# Altium PCB PoHalf.PcbDoc (part 2 of 2)
Units mil, origin at the board's own origin, x right, y up, seen from the top; angles counter-clockwise.
Board outline 6500 x 4500 mil, 2 copper layers (Top Layer, Bottom Layer), stack 33.512 mil thick; 134 components, 97 nets, 504 pads, 130 vias.
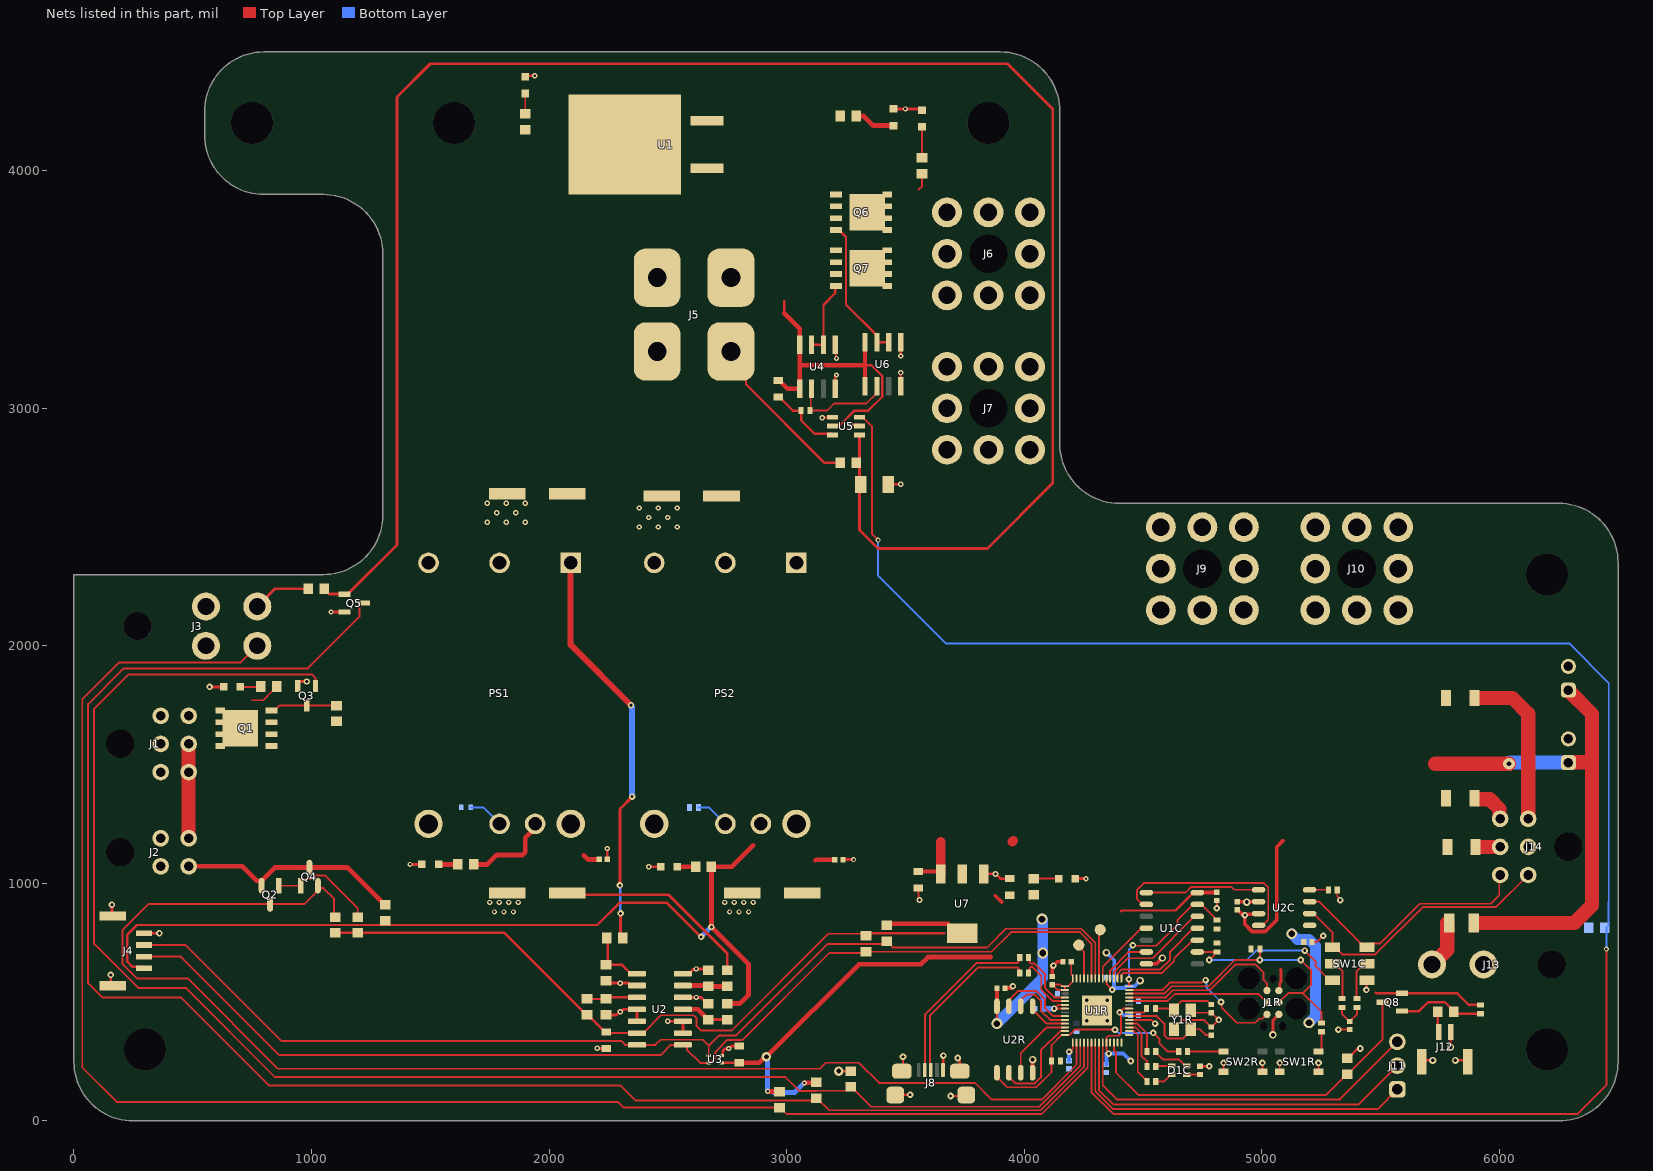
[diagram p2: the nets of this part, all layers, seen from the top]

## Via types
v1: diameter 22, hole 10, Top Layer to Bottom Layer, tented both sides, 56 vias
v2: diameter 27.56, hole 11.81, Top Layer to Bottom Layer, tented both sides, 40 vias
v3: diameter 27, hole 13, Top Layer to Bottom Layer, tented both sides, 11 vias
v4: diameter 31.5, hole 15.75, Top Layer to Bottom Layer, tented both sides, 10 vias
v5: diameter 45.28, hole 27.56, Top Layer to Bottom Layer, tented both sides, 5 vias
v6: diameter 30, hole 15, Top Layer to Bottom Layer, tented both sides, 3 vias
v7: diameter 25, hole 12, Top Layer to Bottom Layer, tented both sides, 2 vias
v8: diameter 40, hole 20, Top Layer to Bottom Layer, tented both sides, 2 vias
v9: diameter 50, hole 20, Top Layer to Bottom Layer, tented both sides, 1 vias

## Nets (pads, with @x,y where several pads share a name; then routed paths per layer and width w, separated by ;. In a path a pad name is that pad's centre, name@x,y a point inside that pad or via, vN(x,y) a via of type N, cw(c..) or ccw(c..) an arc to the next point about the centre after c; other vN are vias at no path point) (continued)
3V3_MEAS: R9.2 R11.1 U2.3 | length 212.7
  Top Layer w10: R9.2@2160,513.5 R11.1@2240,513.5 2246.5,520 U2.3@2370,520
3V3_RP2CAN: C1C.1 C3C.1 C3R.1 C4.1 C4R.1 C5C.1 C5R.1 C6R.1 C7R.1 C8.1 C8R.1 C9R.1 C10R.1 C11.1 D1C.4 J1R.2 Q8.2 R1C.1 R3.1 R4C.1 R4R.1 R5.1 R5R.1 R9.1 R20.1 R22.1 R26.1 R27.1 R28.2 R31.1 U1C.14 U1R.1 U1R.10 U1R.22 U1R.33 U1R.42 U1R.43 U1R.44 U1R.48 U1R.49 U2.6 U2C.5 U2R.8 U3.3 U7.2 U7.4 | length 8643.8
  Top Layer w7.87: U2.6@2370,370 2395.59,370 2470.59,445 2609,445 2620,434 2620,400 2640,380 2768,380 3176,788 R26.1@3342.5,788 ; C4R.1@4117.95,573.8 C4R.1@4118.73,573.8 ; U1R.49@4171.59,472.81 v2(4126.81,472.81) 4142.55,488.56 U1R.48@4171.59,488.56 ; U1R.43@4184.88,567.3 4204.56,586.99 U1R.42@4204.56,600.27 4204.56,613.56 4202.68,613.56 4198.07,618.17 C10R.1@4198.07,669.66 ; v2(4188.81,291.71) 4191.7,291.71 4204.56,304.57 U1R.1@4204.56,329.6 ; U1R.33@4346.29,600.27 4346.29,576.75 v2(4371.1,551.95) ; v2(4356.14,283.84) 4356.14,287.59 4346.29,297.43 4346.29,349.41 4355.52,358.64 4371.77,358.64 4397.47,358.64 4407.96,369.12 4407.96,445.19 4401.41,451.74 v2(4401.41,457.06) 4417.16,472.81 U1R.22@4442.26,472.81 ; C1C.1@4810.37,961.89 C1C.1@4810.86,962.38 ; C4R.1@4118.73,573.8 4125.82,566.71 4125.82,565.92 4140.19,551.55 U1R.44@4171.59,551.55 U1R.43@4171.59,567.3 4158.3,567.3 4151.81,573.8 C4R.1@4118.73,573.8
  Top Layer w9.84: v5(3885.47,409.82) U2R.8@3885.47,482.6 ; 4408.89,883.13 4411.77,886 4637.04,886 4712.93,961.89 U1C.14@4729.66,961.89 ; D1C.4@4684.88,195.25 4685.17,195.55 4737.59,195.55 C5C.1@4739.99,193.14
  Top Layer w10: R3.1@1100,791.5 R5.1@1195,791.5 1812.5,791.5 2157.5,446.5 R9.1@2160,446.5 2175,431.5 2178.5,431.5 2235,375 C4.1@2240,375 2245,370 U2.6@2370,370 ; U3.3@2727.56,244.25 2799.25,244.25 C8.1@2800,245 ; R26.1@3334,779.5 3342.5,788 3344.5,790 3664,790 ; C5C.1@4739.99,193.14 C5C.1@4739.99,195.27 ; 5480,540 5482.5,537.5 Q8.2@5591,537.5 5822.5,537.5 5871.3,488.7 R31.1@5920,488.7
  Top Layer w11.81: J1R.2@5072.08,548.8 5075.75,552.47 5075.75,580.23 5080.49,584.96 5080.49,636.26 5078.58,638.17
  Top Layer w15.75: 3878.58,948.4 3905.35,921.63 ; U2R.8@3885.47,482.6 C3R.1@3885.47,559.43 ; U1C.14@4729.66,961.89 C1C.1@4810.37,961.89
  Top Layer w20: C8.1@2800,245 2800.07,245.07 2884.66,245.07 2909.59,270 v8(2915,270) 3305,660 3565.5,660 3595.5,690 3859.13,690 ; v1(2920,125) 2920.54,125 2922.04,123.5 R20.1@2970,123.5 ; v1(3075,160) 3075.38,160.38 3121.88,160.38 R22.1@3125,163.5 ; R27.1@3416.37,830 U7.4@3680,830
  Bottom Layer w15.75: C7R.1@4188.81,253.72 v2(4188.81,291.71) ; C6R.1@4346.29,237.97 4346.29,283.84 4417.16,283.84 v2(4448.66,252.34) ; v4(4346.29,709.03) 4379.17,676.16 C9R.1@4379.17,602.73 4378.48,602.04 v2@4378.48,559.33 ; v2(4371.1,551.95) v2@4378.48,559.33 ; v2(4401.41,457.06) 4406.74,457.06 4418.65,445.15 C8R.1@4447.28,445.15 ; v4(4488.03,590.92) 4464.01,566.91 4428.55,566.91 4420.97,559.33 v2@4378.48,559.33
  Bottom Layer w20: v8(2915,270) 2915,264.59 2920,259.59 v1(2920,125) 2920.38,124.62 2940.57,124.62 2945.19,120 3035,120 v1(3075,160)
  Bottom Layer w23.62: 4041.08,565.43 4079.96,526.55 C5R.1@4079.96,472.81 v2(4126.81,472.81)
  Bottom Layer w45.28: v5(3885.47,409.82) 4041.08,565.43 4078,602.35 v5(4078,707) 4078,847 v5(4075,850) ; v5(5125.82,787.77) 5149.64,763.95 5199.29,763.95 5226.22,737.02 5226.22,441.02 5198.89,413.69 v5(5198.89,413.13)
5V: C4C.1 C7.1 C9.1 C10.1 F3.1 J4.1 PS2.7 PS2.8 R6.1 R13.1 R17.1 U2C.3 U7.3 | length 4670.9
  Top Layer w10: J4.1@295,642.36 288.9,648.46 246.54,648.46 225,670 225,785 265,825 2203,825 2296,918 2497,918 v3(2640,775)
  Top Layer w15.75: C10.1@3555,1050 U7.3@3639.45,1050 ; C4C.1@4897.48,888.76 4898.26,888.76 4916.74,870.28 4925.2,870.28 v2(4928.97,866.51) ; U2C.3@4987.04,873.01 4984.03,870 4932.45,870 v2(4928.97,866.51) ; 5090,1180 5063,1153 5063,845.49 5014.54,797.02 4959.55,797.02 4928.97,827.6 v2(4928.97,866.51)
  Top Layer w20: R17.1@2750,493.5 2750.72,494.22 2802.5,494.22 2840,531.72 2840,660 v3(2683.5,816.5) R13.1@2683.5,1070 2770,1070 2860,1160 ; 3122,1097 3125,1100 C9.1@3202.87,1100
  Top Layer w40: U7.3@3649.45,1040 3649.45,1174.45 ; 3949.45,1174.45 3955,1180
  Bottom Layer w20: v3(2640,775) 2641,775 2682.5,816.5 v3(2683.5,816.5)
5V_MEAS: R15.1 R17.2 U2.11 | length 206.2
  Top Layer w12: R15.1@2670,426.5 R17.2@2750,426.5
  Top Layer w20: U2.11@2563.31,470 2626.5,470 2657.5,439 2657.5,436.5 2667.5,426.5 R15.1@2670,426.5
12V: C2.1 C3.1 F2.1 F4.2 J1.4 J1.5 J2.4 J15.1 J16.1 PS1.7 PS1.8 Q1.1 Q1.2 Q1.3 R4.1 R7.1 R16.1 | length 3807.2
  Top Layer w12: C2.1@2076,960 2084,952 2503,952 2750,705 R16.1@2750,633.5
  Top Layer w20: J1.5@482.41,1586.18 J1.5@483.11,1586.89 ; R7.1@1683.5,1080 1740,1080 1780,1120 1888.28,1120 1900,1131.72 1900,1191.13 1941.57,1232.71 PS1.7@1941.57,1250.79 ; 2146,1118 2163,1101 C3.1@2210.88,1101
  Top Layer w60: J2.4@482.41,1190 J1.5@482.41,1586.18 ; 5730,1503.44 v9(6040.66,1503.44) ; 5920.16,833.44 6315.66,833.44 6390.66,908.44 6390.66,1513.44 ; J16.1@6290.66,1508.44 6292.55,1510.33 6387.55,1510.33 6390.66,1513.44 ; J15.1@6290.66,1813.44 6390.66,1713.44 6390.66,1513.44
  Bottom Layer w60: v9(6040.66,1503.44) 6045.66,1508.44 J16.1@6290.66,1508.44
"12V Toggle": J1.6 Q1.D R1.2 | length 130
  Top Layer w7.87: 750,1771 796.5,1771 835.94,1810.44 838.44,1810.44 854.5,1826.5 R1.2@854.5,1829
12V_MEAS: R14.1 R16.2 U2.13 | length 188.1
  Top Layer w20: U2.13@2563.31,570 2666.5,570 R14.1@2670,566.5 R16.2@2750,566.5
AUX_SWITCH: J3.3 R20.2 U1R.5 | length 6880.3
  Top Layer w7.87: J3.3@771.94,2000 701.07,1929.13 189.13,1929.13 35,1775 35,225 180,80 2290,80 2313.5,56.5 R20.2@2970,56.5 2972.5,56.5 2999.7,29.3 4073.35,29.3 4267.55,223.51 U1R.5@4267.55,329.6
CANCLK_RP2CAN: U1C.6 U1R.32 | length 217.8
  Top Layer w7.87: U1R.32@4362.04,600.27 4362.04,633.13 4440.31,711.39 U1C.6@4514.6,711.39
CANH: J14.6 SW1C.4 U2C.7 | length 1086.1
  Top Layer w7.87: U2C.7@5184.88,923.01 U2C.7@5201.61,923.01 5241.96,923.01 5415.19,749.78 5415.19,746.43 5430.94,730.69 SW1C.4@5442.75,730.69 ; SW1C.4@5454.56,730.69 SW1C.4@5442.75,730.69 ; J14.6@6003.25,1035.33 6000,1032.07 6000,950 5964.24,914.24 5664.24,914.24 5496.43,746.43 5458.5,746.43 SW1C.4@5442.75,730.69
CANL: J14.3 SW1C.1 U2C.6 | length 1183.7
  Top Layer w8: U2C.6@5184.88,873.01 U2C.6@5201.61,873.01 5218.34,873.01 5297.08,794.27 SW1C.1@5297.08,730.69 5308.89,730.69 5338.88,700.7 5478.51,700.7 5677.81,900 5986.04,900 J14.3@6121.36,1035.33
CANRX_RP2CAN: U1C.2 U2C.4 | length 845.4
  Top Layer w7.87: U1C.2@4514.6,911.39 4497.87,911.39 4474.25,935.02 4474.25,971.18 4504.03,1000.96 5009.23,1000.96 5027.4,982.79 5027.4,847.01 5003.4,823.01 U2C.4@4987.04,823.01
CANTX_RP2CAN: U1C.1 U2C.1 | length 487.4
  Top Layer w7.87: U1C.1@4514.6,961.39 4679.03,961.39 4702.85,985.21 4872.49,985.21 4884.7,973.01 U2C.1@4987.04,973.01
DBG_TX_RP2040: J1R.5 U1R.27 | length 714.8
  Top Layer w7.87: U1R.27@4442.26,551.55 4583.25,551.55 4614.75,583.05 4749.16,583.05 4759,592.89 v2(4763.62,592.89) ; v2(4828.58,500.74) 4831.72,497.59 4831.72,475.57 4893.94,413.36 4972.12,413.36 4988.99,430.23 5002.02,430.23 5020.58,448.8 J1R.5@5022.08,448.8
  Bottom Layer w7.87: v2(4763.62,592.89) 4767.35,589.16 4767.35,561.97 v2(4828.58,500.74)
GND: C1.2 C1C.2 C1R.2 C2.2 C2C.1 C2R.2 C3.2 C3C.2 C3R.2 C4.2 C4C.2 C4R.2 C5.2 C5C.2 C5R.2 C6.2 C6R.2 C7.2 C7R.2 C8.2 C8R.2 C9.2 C9R.2 C10.2 C10R.2 C11.2 C11R.2 C12R.2 C13R.2 D1.2 D2.2 D3.2 D4.2 D5.2 D6.2 D7.2 J1.1 J1.2 J1.3 J1R.6 J2.1 J2.2 J3.1 J3.2 J4.4 J4.S1 J4.S2 J5.3 J5.4 J8.5 J8.6 J8.7 J8.8 J8.9 J9.1 J10.1 J12.2 J12.S1 J12.S2 J13.1 J14.2 J15.2 J16.2 PS1.2 PS1.3 PS1.4 PS2.2 PS2.3 PS2.4 Q3.2 Q5.2 R6C.2 R10.2 R11.2 R14.2 R15.2 R24.2 R29.2 R32.1 R33.2 R34.1 SW1C.6 SW1R.B1 SW1R.B2 SW2R.B1 SW2R.B2 U1C.7 U1R.19 U1R.57 U2.2 U2.4 U2.5 U2.9 U2.10 U2.12 U2.14 U2C.2 U2R.4 U3.4 U4.4 U4.5 U5.2 U5.4 U6.4 U6.5 U7.1 Y1R.2 Y1R.4 | length 4049.9
  Top Layer w7.87: v4(4350.23,421.63) U1R.57@4354.17,425.57 ; U1R.19@4442.26,425.57 4535.27,425.57 v2(4551.02,409.82) ; SW2R.B1@4839.4,207.06 v2(4839.4,244.47) ; SW2R.B2@5002.79,207.06 v2(5002.79,244.47) ; SW1R.B1@5075.51,210.8 5075.62,210.92 v2(5075.62,244.47) ; C3C.2@5211.02,753.13 5211.48,753.59 5233.37,753.59 v2(5259.06,779.28) ; SW1R.B2@5239.01,207.06 v2(5239.01,244.47) ; R6C.2@5317.75,973.01 5317.75,946.43 5330.55,933.64 v2(5330.55,929.5) ; v2(5322.67,384.82) C2C.1@5369.92,384.82 ; v2(5440.78,551.55) 5440.78,590.92 SW1C.6@5442.75,592.89
  Top Layer w8: Y1R.4@4630.62,386.2 4630.62,392.1 4664.15,425.63 4756.27,425.63 4786.45,395.45 C1R.2@4787.24,395.45 4788.03,395.45 v2@4818.14,425.57 ; Y1R.2@4700.62,466.2 4711.14,455.69 C2R.2@4787.24,455.69 4788.03,455.69 v2@4818.14,425.57 ; v2(4810.86,895.25) C1C.2@4810.86,928.13 C1C.2@4810.86,930.25 ; v2(4818.73,425.57) v2@4818.14,425.57 ; SW1R.B1@5075.51,210.8 SW1R.B1@5078.18,208.13
  Top Layer w9.84: D3.2@1900,4395 1905,4400 v1(1940,4400) ; v1(3150,2960) 3151.2,2961.2 3191.8,2961.2 U5.4@3193,2962.4 ; U4.4@3205,3082 3205,3135 v1(3210,3140) ; U4.5@3205,3268 3207.67,3265.33 3207.67,3212.33 v1(3210,3210) ; v1(3270,2930) 3302,2930 U5.2@3307,2925 ; U6.4@3480,3092 v1(3480,3150) ; v1(3480,3220) U6.5@3480,3278 ; C5C.2@4739.99,230.1 v2(4779.36,230.1)
  Top Layer w10: v8(3220,210) R24.2@3270,210 ; J8.9@3457.43,108.93 3458.5,110 v2(3520,110) ; J8.6@3484.99,209.33 3490,214.33 v2(3490,270) ; C10.2@3555,980 3555,939.06 3560,934.06 v7(3560,930) ; J8.5@3658.22,214.25 3659.11,215.14 3659.11,274.11 v2(3660,275) ; v2(3690,105) 3752.71,105 J8.8@3756.64,108.93 ; v2(3720,265) 3720,260.25 3729.09,251.16 J8.7@3729.09,209.33 ; U7.1@3830.55,1040 v7(3880,1040) 3900,1020 C11.2@3940,1020 ; R29.2@5360,263.5 5362.5,263.5 5400.64,301.64 5411.64,301.64 v2(5415,305) ; J12.S1@5667.95,229.02 J12.S1@5672.94,234 ; J12.S1@5672.95,249.02 5678.94,255 v6(5720,255) ; v6(5795,310) J12.2@5795,375 ; v6(5815,255) 5861.85,255 J12.S2@5867.83,249.02
  Top Layer w11.81: v4(5047.17,362.25) 5047.17,423.88 J1R.6@5072.08,448.8
  Top Layer w12: v3(155,615) 155,577.64 J4.S2@163.11,569.53 ; v3(160,910) 160,865.94 J4.S1@163.11,862.83 ; J4.4@295,790 v3(360,790) ; v3(571,1827) D1.2@630,1827 ; Q3.2@942.5,1831 942.5,1845 947.5,1850 v3(980,1850) ; v1@1080,2140 v1(1082.5,2142.5) Q5.2@1139,2142.5 ; v1(1415,1080) D2.2@1465,1080 ; v1(2203,306) 2203.5,305.5 2239.5,305.5 C4.2@2240,305 ; R11.2@2240,446.5 2283.79,446.5 2297.29,460 v1(2300,460) 2302.71,460 2312.71,470 U2.4@2370,470 U2.5@2370,420 ; R10.2@2240,590 2250,580 v1(2300,580) 2334.41,580 2344.41,570 U2.2@2370,570 ; v1@2245,1147 v1(2245.14,1146.86) C3.2@2245.14,1101 ; v1(2420,1070) D4.2@2470,1070 ; v1(2500,420) U2.10@2563.31,420 U2.9@2563.31,370 ; U2.12@2563.31,520 v1(2620,520) 2641,520 2667.5,493.5 R15.2@2670,493.5 ; U2.14@2563.31,620 2588.9,620 2606.98,638.09 2618.09,638.09 v1(2620,640) 2663.5,640 R14.2@2670,633.5 ; U3.4@2731.4,275.84 2731.4,295 2739.49,303.09 2754.09,303.09 v1(2756,305) 2757.65,305 2767.65,315 C8.2@2800,315 ; C9.2@3237.13,1100 v1(3282,1100) ; C5.2@3427.48,2680 v1(3480,2680) ; D5.2@3450,4260 v1(3500,4260) D6.2@3560,4260 ; D7.2@4215,1020 v1(4260,1020)
  Top Layer w15.75: C3R.2@3919.72,559.43 3944.72,559.43 v2(3952.59,567.3) ; U2R.4@4035.47,203.07 v4(4035.47,258.34) ; C4R.2@4117.95,608.05 4117.95,645.8 4122.87,650.72 v2(4122.87,653.91) 4138.84,669.89 4163.59,669.89 C10R.2@4163.81,669.66 ; U1C.7@4514.6,661.39 4557.44,661.39 v4(4581.99,685.94) ; C4C.2@4897.48,923.01 4898.16,922.32 4936.16,922.32 v4(4936.85,921.63) 4937.53,922.32 4986.35,922.32 U2C.2@4987.04,923.01
  other v1: 1770,880 1810,880 1850,880 2760,880 2800,880 2840,880 1750,920 1790,920 1830,920 1870,920 2740,920 2780,920 2820,920 2860,920 2380,2500 2460,2500 2540,2500 1740,2520 1820,2520 1900,2520 2420,2540 2500,2540 1780,2560 1860,2560 2380,2580 2460,2580 2540,2580 1740,2600 1820,2600 1900,2600
  other v4: 4263.62,421.63 4263.62,508.24 4350.23,508.24
INT_RP2CAN: U1C.4 U1R.34 | length 297.2
  Top Layer w7.87: U1R.34@4330.55,602.73 4330.55,648.33 4493.61,811.39 U1C.4@4514.6,811.39
KILL_FEEDBACK: Q5.3 R22.2 U1R.4 | length 7142.1
  Top Layer w7.87: Q5.3@1221,2180 1207,2180 1202,2175 1202,2122 985,1905 210,1905 60,1755 60,580 120,520 450,520 820,150 2300,150 2363.26,86.74 3115.24,86.74 R22.2@3125,96.5 3127.5,96.5 3179,45 4069,45 4251.81,227.81 U1R.4@4251.81,329.6
KILL_SWITCH: J3.4 R2.2 | length 245.5
  Top Layer w12: J3.4@771.94,2165.35 846.58,2240 R2.2@986.5,2240
Leak_Detect: Q8.3 R29.1 U1R.12 | length 1544.5
  Top Layer w7.87: U1R.12@4377.79,329.6 4377.79,298.37 4386,290.16 4386,204 4480,110 5271,110 5357.5,196.5 R29.1@5360,196.5 5362.5,196.5 5509,343 Q8.3@5509,500
LEDB_RP2CAN: R8C.1 U1R.18 | length 168.1
  Top Layer w7.87: U1R.18@4442.26,409.82 4475.11,409.82 4516.57,368.36 R8C.1@4516.57,291.71
LEDG_RP2CAN: R7C.1 U1R.17 | length 213.3
  Top Layer w7.87: U1R.17@4442.26,394.07 4468.59,394.07 4493.93,368.73 4493.93,272.05 4503.79,262.2 4506.71,262.2 4516.57,252.34 R7C.1@4516.57,228.72
LEDR_RP2CAN: R5C.1 U1R.16 | length 255
  Top Layer w7.87: U1R.16@4442.26,378.32 4462.07,378.32 4478.18,362.21 4478.18,208.05 4516.57,169.66 R5C.1@4516.57,165.73
MISO_RP2CAN: U1C.12 U1R.31 | length 475
  Top Layer w7.87: U1R.31@4377.79,600.27 4377.79,626.61 4436.2,685.02 4540.32,685.02 4716.7,861.39 U1C.12@4729.17,861.39
MOSI_RP2CAN: U1C.11 U1R.30 | length 454.6
  Top Layer w7.87: U1R.30@4393.54,600.27 4393.54,620.08 4411.23,637.77 4572.79,637.77 4614.01,678.99 4614.01,712.97 4712.44,811.39 U1C.11@4729.17,811.39
MOTOR_EN: R19.1 R21.2 U5.6 | length 319.2
  Top Layer w10: R19.1@2964,3047 2969,3047 3026,2990 R21.2@3061.3,2990 3061.3,2948.7 3117.4,2892.6 3188,2892.6 U5.6@3193,2887.6
MOTOR_PWR: J6.1 J7.1 Q6.D Q7.D R25.1 | length 72.7
  Top Layer w7.87: 3555,3920 3570,3935 R25.1@3570,3986.5
nCS_RP2CAN: R4C.2 U1C.13 U1R.28 | length 646.2
  Top Layer w7.87: v2(4440.78,596.43) 4440.78,567.3 U1R.28@4442.26,567.3 ; v2(4457.73,739.33) 4459.29,737.77 4556.14,737.77 4645.25,826.88 4645.25,844.21 4712.44,911.39 U1C.13@4729.17,911.39 4745.9,911.39 4800.03,857.26 4800.03,852.73 4806.92,845.84 R4C.2@4810.86,845.84
  Bottom Layer w7.87: v2(4440.78,596.43) 4440.78,720.09 4457.73,737.03 v2(4457.73,739.33)
NetC2C_2: C2C.2 R2C.2 R3C.2 | length 144.3
  Top Layer w7.87: R2C.2@5338.42,477.73 5338.42,449.78 5369.13,419.07 C2C.2@5369.92,419.07 5370.7,419.07 5401.41,449.78 R3C.2@5401.41,477.73
NetC2R_1: C2R.1 R1R.2 Y1R.3 | length 263.4
  Top Layer w8: R1R.2@4552.91,472.81 4624.01,472.81 Y1R.3@4630.62,466.2 4630.62,472.1 4664.15,505.63 4770.76,505.63 4786.45,489.94 C2R.1@4787.24,489.94
NetC5_1: C5.1 Q5.1 R2.1 R18.2 U5.1 | length 8119.1
  Top Layer w12: R2.1@1053.5,2240 1053.5,2237.5 1073.5,2217.5 Q5.1@1139,2217.5 1153,2217.5 1360,2424.5 1360,4310 1500,4450 3930,4450 4120,4260 4120,2685 3845,2410 3384.82,2410 3307,2487.82 3307,2680 3307,2770 3307,2813 U5.1@3307,2887.6
NetD1_1: D1.1 R1.1 | length 88.3
  Top Layer w7.87: D1.1@700,1827 785.5,1827 R1.1@787.5,1829
NetD1C_1: D1C.1 R5C.2 | length 80.1
  Top Layer w7.87: R5C.2@4553.97,165.73 4587.44,165.73 4616.96,195.25 D1C.1@4621.88,195.25
NetD1C_2: D1C.2 R7C.2 | length 68.7
  Top Layer w7.87: R7C.2@4553.97,228.72 4555.94,230.69 D1C.2@4621.88,230.69
NetD1C_3: D1C.3 R8C.2 | length 158.5
  Top Layer w7.87: R8C.2@4553.97,291.71 4553.97,287.77 4582.51,259.23 4651.41,259.23 4679.96,230.69 D1C.3@4684.88,230.69
NetD2_1: D2.1 R7.2 | length 81.5
  Top Layer w20: D2.1@1535,1080 R7.2@1616.5,1080
NetD3_1: D3.1 R8.2 | length 85
  Top Layer w7.87: R8.2@1900,4240 D3.1@1900,4325
NetD4_1: D4.1 R13.2 | length 76.5
  Top Layer w20: D4.1@2540,1070 R13.2@2616.5,1070
NetD5_1: D5.1 R23.2 | length 173.1
  Top Layer w20: R23.2@3293.5,4230 3325,4230 3365,4190 D5.1@3450,4190
NetD6_1: D6.1 R25.2 | length 131.5
  Top Layer w7.87: R25.2@3570,4053.5 D6.1@3570,4185
NetD7_1: D7.1 R28.1 | length 105
  Top Layer w7.87: R28.1@4040,1020 D7.1@4145,1020
NetF1_2: F1.2 J14.1 | length 686.8
  Top Layer w60: F1.2@5904.16,1780 6055,1780 6121.36,1713.64 J14.1@6121.36,1271.55
NetF2_2: F2.2 J14.4 | length 145.7
  Top Layer w60: F2.2@5915.16,1354.44 5960.05,1354.44 6001.34,1313.14 6001.34,1273.46 J14.4@6003.25,1271.55
NetF3_2: F3.2 J14.5 | length 92.6
  Top Layer w60: F3.2@5910.66,1153.44 J14.5@6003.25,1153.44
NetF4_1: F4.1 J13.2 | length 203.1
  Top Layer w60: J13.2@5716.72,658.44 5719.17,658.44 5781.16,720.43 F4.1@5781.16,833.44
NetJ11_1: J11.1 U1R.7 | length 1541.5
  Top Layer w7.87: U1R.7@4299.05,329.6 4299.05,125.91 4374.96,50 5488,50 J11.1@5571,133
NetJ11_2: J11.2 U1R.8 | length 1548.1
  Top Layer w7.87: U1R.8@4314.8,329.6 4314.8,142.2 4314.8,130.2 4375,70 5408,70 J11.2@5571,233
NetJ11_3: J11.3 U1R.9 | length 1545.1
  Top Layer w7.87: U1R.9@4330.55,329.6 4330.55,149.45 4389,91 5329,91 J11.3@5571,333
NetJ12_1: J12.1 R30.2 | length 90.3
  Top Layer w10: J12.1@5740.79,355 5740.79,444.29 R30.2@5741.5,445
NetPS1_6: PS1.6 R34.2 | length 150.6
  Bottom Layer w7.87: R34.2@1670,1320 1722.76,1320 PS1.6@1791.97,1250.79
NetPS2_6: PS2.6 R33.1 | length 141.9
  Bottom Layer w7.87: R33.1@2628.7,1320 2672.76,1320 PS2.6@2741.97,1250.79
NetQ1_4: Q1.4 Q3.3 R4.2 | length 281.9
  Top Layer w7.87: Q1.4@832,1728 845,1728 866,1749 Q3.3@980,1749 980.5,1748.5 R4.2@1105,1748.5
NetQ2_1: Q2.1 Q4.1 R5.2 | length 456.2
  Top Layer w7.87: Q2.1@862.05,990 Q4.1@955,990 955,1010.31 963.4,1018.71 998.71,1018.71 1012.89,1032.89 1057.11,1032.89 1195,895 R5.2@1195,858.5
NetQ6_4: Q6.4 U6.6 U6.7 | length 600.9
  Top Layer w9.84: Q6.4@3208,3750 3221,3750 3250,3721 3250,3436 3380,3306 U6.7@3380,3278 U6.6@3430,3278
NetQ7_4: Q7.4 U4.6 U4.7 | length 317.7
  Top Layer w9.84: U4.7@3105,3268 U4.6@3155,3268 3155,3435 3205,3485 Q7.4@3205,3515
NetQ8_1: Q8.1 R30.1 R31.2 | length 366.2
  Top Layer w10: Q8.1@5591,462.5 5662.5,462.5 5700,500 5771,500 5808.5,462.5 R30.1@5808.5,460 5817.2,451.3 R31.2@5920,451.3
NetR2C_1: R2C.1 SW1C.2 | length 172.3
  Top Layer w7.87: SW1C.2@5297.08,661.79 5308.89,661.79 5340.39,630.29 5340.39,517.1 R2C.1@5338.42,515.13
NetR3C_1: R3C.1 SW1C.5 | length 172.3
  Top Layer w7.87: R3C.1@5401.41,515.13 5399.44,517.1 5399.44,630.29 5430.94,661.79 SW1C.5@5442.75,661.79
NetR6C_1: R6C.1 U2C.8 | length 78.7
  Top Layer w7.87: U2C.8@5201.61,973.01 R6C.1@5280.35,973.01
NetR6R_1: R6R.1 SW1R.A2 | length 91.3
  Top Layer w7.87: SW1R.A2@5239.01,291.71 5242.95,291.71 5251.81,300.57 R6R.1@5251.81,375.37
NetR7R_1: R7R.1 SW2R.A1 | length 151.6
  Top Layer w7.87: R7R.1@4687.83,291.71 SW2R.A1@4839.4,291.71
NetR21_1: R21.1 U4.2 U6.2 | length 434.6
  Top Layer w7.87: U4.2@3105,3082 3101.85,3078.85 3101.85,2993.15 R21.1@3098.7,2990 3101.85,2990 3170,2990 3200,3020 3336,3020 3380,3064 U6.2@3380,3092
NetTP1_TP: TP1.TP U1R.39 | length 148.8
  Top Layer w7.87: TP1.TP@4230,740 4230,733.5 4251.81,711.7 U1R.39@4251.81,600.27
NetTP2_TP: TP2.TP U1R.35 | length 206.9
  Top Layer w7.87: U1R.35@4314.8,600.27 4314.8,799.8 TP2.TP@4320,805
NetU1R_11: U1R.11
NetU1R_13: U1R.13
NetU1R_14: U1R.14
NetU1R_15: U1R.15
NetU1R_38: U1R.38
NetU1R_40: U1R.40
NetU1R_41: U1R.41
QSPI_SCLK_RP2040: U1R.52 U2R.6 | length 286.6
  Top Layer w7.87: U2R.6@3985.47,486.59 3985.47,508.25 4009.09,531.87 4045.25,531.87 4070.7,506.42 4070.7,463.76 4108.89,425.57 U1R.52@4171.59,425.57
QSPI_SD0_RP2040: U1R.53 U2R.5 | length 178.4
  Top Layer w7.87: U2R.5@4035.47,486.59 4035.47,468.68 4094.33,409.82 U1R.53@4171.59,409.82
QSPI_SD1_RP2040: U1R.55 U2R.2 | length 427.3
  Top Layer w7.87: U2R.2@3935.47,207.06 3935.47,185.41 3963.03,157.85 3975.63,157.85 3975.68,157.79 4045.25,157.79 4070.7,183.25 4070.7,297.25 4151.78,378.32 U1R.55@4171.59,378.32
QSPI_SD2_RP2040: U1R.54 U2R.3 | length 309.4
  Top Layer w7.87: U2R.3@3985.47,207.06 3985.47,285.21 4094.33,394.07 U1R.54@4171.59,394.07
QSPI_SD3_RP2040: U1R.51 U2R.7 | length 339.2
  Top Layer w7.87: U2R.7@3935.47,486.59 3935.47,508.25 3974.84,547.62 4051.77,547.62 4086.94,512.45 4086.94,476.48 4122.11,441.32 U1R.51@4171.59,441.32
QSPI_SS_RP2040: R5R.2 R7R.2 U1R.56 U2R.1 | length 1007.5
  Top Layer w7.87: U2R.1@3885.47,207.06 3885.47,185.41 3928.83,142.05 4051.77,142.05 4114.99,205.27 R5R.2@4114.99,252.34 4114.99,319.27 U1R.56@4158.3,362.58 ; U1R.56@4171.59,362.58 4191.4,362.58 4213.05,384.23 v2(4382.37,384.23) ; v2(4543.14,370.45) 4570.27,343.32 4570.27,324.91 4603.47,291.71 R7R.2@4650.43,291.71
  Bottom Layer w7.87: v2(4382.37,384.23) 4383.04,384.23 4396.82,370.45 v2(4543.14,370.45)
RUN_RP2040: J1R.4 R4R.2 R6R.2 U1R.26 | length 1275.3
  Top Layer w7.87: U1R.26@4442.26,535.8 4589.77,535.8 4621.27,567.3 4776.19,567.3 4886.42,677.54 v2(4991.96,677.54) R4R.2@4991.96,724.78 ; J1R.4@5072.08,498.8 5111.64,538.36 5172.12,538.36 ; v2(5163.87,677.54) 5165.19,677.54 5207.52,635.21 5207.52,573.76 5172.12,538.36 ; R6R.2@5251.81,412.77 5251.81,458.67 5172.12,538.36
  Bottom Layer w7.87: v2(4991.96,677.54) v2(5163.87,677.54)
SCK_RP2CAN: U1C.10 U1R.29 | length 400.1
  Top Layer w7.87: U1R.29@4409.29,600.27 4409.29,613.56 4417.75,622.02 4579.32,622.02 4631.55,674.26 4631.55,684.02 4708.92,761.39 U1C.10@4729.17,761.39
SCL_0: J4.2 R26.2 U1R.37 U2.8 U3.2 | length 4622.4
  Top Layer w7.87: J4.2@295,691.57 450.43,691.57 865,277 2469.36,277 2512.36,320 2572.13,320 2580,312.13 2580,300 2635.75,244.25 U3.2@2672.44,244.25 2676.38,244.25 2701,268.87 2701,292 2749,340 2775.52,340 2775.76,340.24 2813.24,340.24 3180.5,707.5 R26.2@3334,707.5 ; R26.2@3334,712.5 3862.5,712.5 3945,795 4235,795 4283.3,746.7 U1R.37@4283.3,600.27
SDA_0: J4.3 R27.2 U1R.36 U2.7 U3.1 | length 4647.8
  Top Layer w7.87: J4.3@295,740.79 469.21,740.79 873,337 2303,337 2320,320 U2.7@2370,320 2448,320 2470.05,342.05 2646.83,342.05 2672.44,316.44 ; U3.1@2672.44,275.75 2672.44,316.44 ; R27.2@3421,756.5 R27.2@3432.5,745 ; U1R.36@4299.05,600.27 4299.05,750.99 4240.87,809.17 3922.66,809.17 3843.49,730 3447.5,730 3439.56,737.94 3439.56,740.44 3435,745 R27.2@3432.5,745 ; 2672.44,316.44 2716,360 2788,360 3173,745 R27.2@3432.5,745
Servo: Q2.3 Q4.2 R3.2 U1R.2 | length 5650.1
  Top Layer w7.87: Q4.2@1027.05,990 Q4.2@1027.05,987.76 ; R3.2@1100,858.5 1095,863.5 1095,935 1050,980 1034.81,980 Q4.2@1027.05,987.76 ; U1R.2@4220.31,329.6 4220.31,236.4 4073.91,90 3863,90 3793,160 3389,160 3304,245 3165,245 3139.76,219.76 2585.77,219.76 2585.54,220 859,220 479,600 265,600 205,660 205,805 313.09,913.09 Q2.3@826.02,913.09 970.45,913.09 1027.05,969.69 Q4.2@1027.05,987.76
SERVO_5V: J2.3 Q2.2 Q4.3 R6.2 | length 967.1
  Top Layer w20: J2.3@483.11,1071.89 708.11,1071.89 768.79,1011.21 787.84,1011.21 Q2.2@790,1009.05 ; Q2.2@787.84,985.47 790,987.63 Q2.2@790,990 Q2.2@790,1009.05 ; R6.2@1310,910 1307.5,910 1150.59,1066.91 Q4.3@991.02,1066.91 846.59,1066.91 790,1010.31 Q2.2@790,1009.05
SOFTWARE_KILL: R32.2 U1R.6 U5.3 | length 8130.7
  Top Layer w7.87: U5.3@3307,2962.4 3320.5,2962.4 3360,2922.9 3360,2470 v1(3385,2445) ; U1R.6@4283.3,329.6 4283.3,126.7 4283.3,121.61 4374.91,30 6330,30 6450.66,150.66 v1(6450.66,723.44)
  Bottom Layer w7.87: v1(3385,2445) 3385,2295 3670,2010 6294.09,2010 6460.89,1843.2 6460.89,921.77 6460.22,921.1 6460.22,823 6450.66,813.44 v1(6450.66,723.44)
Solinoid_3_SW: Q3.1 R24.1 U1R.3 | length 6638.6
  Top Layer w7.87: Q3.1@1017.5,1831 1017.12,1831.38 1017.12,1863.2 1000.32,1880 230,1880 85,1735 85,745 270,560 470,560 845,185 2995,185 3053.26,126.74 3125,126.74 3125.2,126.94 3253.94,126.94 R24.1@3270,143 3272.5,143 3355.5,60 4063.96,60 4236.06,232.1 U1R.3@4236.06,329.6
SWCLK_RP2040: J1R.3 U1R.24 | length 606.9
  Top Layer w7.87: U1R.24@4442.26,504.31 4602.82,504.31 4632.74,534.23 4986.64,534.23 J1R.3@5022.08,498.8
SWDIO_RP2040: J1R.1 U1R.25 | length 718.6
  Top Layer w7.87: U1R.25@4442.26,520.06 4596.3,520.06 4626.22,549.98 4781.61,549.98 4890.87,659.23 4972.12,659.23 5007.52,623.83 5007.52,593.9 5022.08,579.34 J1R.1@5022.08,548.8
TERM_DET_RP2CAN: R1C.2 SW1C.3 U1C.9 | length 723.9
  Top Layer w7.87: U1C.9@4729.17,711.39 R1C.2@4806.92,711.39 ; v2(4779.36,677.54) 4800.03,698.21 4800.03,704.5 R1C.2@4806.92,711.39 ; R1C.2@4810.86,711.39 R1C.2@4806.92,711.39 ; v2(5180.94,716.91) 5227.01,670.84 5227.01,651.15 5285.27,592.89 SW1C.3@5297.08,592.89
  Bottom Layer w7.87: v2(4779.36,677.54) 4936.85,677.54 4976.22,716.91 v2(5180.94,716.91)
USB_N: J8.2 R3R.1 | length 740.9
  Top Layer w7.87: J8.2@3581.45,214.25 3582.13,214.93 3582.13,447.4 3799.08,664.36 3808.74,664.36 3971.74,664.36 3976.35,668.97 3976.35,683.64 R3R.1@3981.14,688.43
USB_P: J8.3 R2R.1 | length 711.3
  Top Layer w7.87: J8.3@3607.04,214.25 3603.1,218.18 3603.1,443.1 3806.49,646.49 3971.74,646.49 3976.35,641.87 3976.35,627.2 R2R.1@3981.14,622.42
USB_RP2040_N: R3R.2 U1R.46 | length 267.4
  Top Layer w7.87: R3R.2@4018.54,688.43 4022.26,684.71 4022.26,667.91 4026.87,663.3 4042.22,663.3 4087.86,617.66 4087.86,558.38 4126.19,520.06 U1R.46@4171.59,520.06
USB_RP2040_P: R2R.2 U1R.47 | length 267.4
  Top Layer w7.87: R2R.2@4018.54,622.42 4022.26,626.14 4022.26,642.94 4026.87,647.55 4035.7,647.55 4072.11,611.14 4072.11,551.86 4119.66,504.31 U1R.47@4171.59,504.31
V+: J5.1 J5.2 Q6.1 Q6.2 Q6.3 Q7.1 Q7.2 Q7.3 R18.1 R19.2 R23.1 U1.1 U1.3 U4.1 U4.8 U5.5 U6.1 U6.8 | length 2098.8
  Top Layer w10: J5.2@2766.02,3238.98 2829.06,3175.94 2829.06,3100.94 3160,2770 R18.1@3226.5,2770 ; 2990,3400 2990,3450 ; U5.5@3193,2925 3196.8,2928.8 3223.92,2928.8 3285.12,2990 3343.98,2990 3402.3,3048.32 3402.3,3135.68 3357.12,3180.86 3330,3180.86
  Top Layer w18: R19.2@2964,3117 2969,3117 3004,3082 U4.1@3055,3082 3055,3180.86 ; 2990,3400 3055,3335 U4.8@3055,3268 3055,3180.86 ; U6.1@3330,3092 3330,3180.86 ; U6.8@3330,3278 3330,3180.86 ; 3055,3180.86 3330,3180.86
Vreg: C1.1 C6.1 F1.1 PS1.1 PS2.1 R8.1 R12.1 U1.2 | length 1709.2
  Top Layer w12: v3(2298,991.37) 2298,1313 v3(2350,1365) ; R12.1@2301,770 v3(2301,874)
  Top Layer w25: PS1.1@2091.18,2349.21 2091.18,2003.82 v3(2345,1750)
  Bottom Layer w12: v3(2298,991.37) 2299.5,989.87 2299.5,875.5 v3(2301,874)
  Bottom Layer w25: v3(2345,1750) 2345,1749.46 2350,1744.46 v3(2350,1365)
Vreg_MEAS: R10.1 R12.2 U2.1 | length 262.7
  Top Layer w10: R12.2@2242.5,770 2246.5,766 2246.5,663.5 R10.1@2240,657 2307.41,657 2344.41,620 U2.1@2370,620
XIN_RP2040: C1R.1 U1R.20 Y1R.1 | length 443.1
  Top Layer w7.87: U1R.20@4442.26,441.32 4558.89,441.32 4590.39,409.82 4590.39,360.52 4604.08,346.83 4667.16,346.83 4700.62,380.29 Y1R.1@4700.62,386.2 4739.9,386.2 4763.62,362.48 4785.96,362.48 C1R.1@4787.24,361.2
XOUT_RP2040: R1R.1 U1R.21 | length 82.1
  Top Layer w7.87: U1R.21@4442.26,457.06 4503.7,457.06 4515.51,468.87 R1R.1@4515.51,472.81
pads on no net: J1.7 J1R.A J1R.B J1R.C J1R.D J1R.E J1R.F J1R.G J2.5 J3. J6.8 J7.8 J8.1 J8.4 J9.8 J10.8 J13. J14.7 SW1R.A1 SW2R.A2 U1C.3 U1C.5 U1C.8 U4.3 U6.3

## Polygon pours and split planes (outlines as drawn)
Vreg on Top Layer "Top Layer-Vreg" (solid, remove dead copper, pour order 33): 2854.84,2155 2662.42,2347.42 2662.42,2587.58 2535,2715 2290,2715 2200,2625 2200,2325 2150,2275 2025,2275 1975,2325 1975,2605 1905,2675 1625,2675 1425,2875 1425,3025 2200,3025 2200,3285 2460,3025 2828,3025 3390,2463 3390,2155
GND on Top Layer "NONET_L-01_P-001" (solid, remove dead copper, pour order 18): 2400,2670 2540,2670 2580,2630 2580,2470 2360,2470 2360,2630
Vreg on Top Layer "NONET_L-01_P-001" (solid, remove dead copper, pour order 31): 5540,1995 5625,1995 5800,1820 5800,1740 5780,1720 5540,1720
5V on Top Layer "NONET_L-01_P-001" (solid, remove dead copper, pour order 30): 5550,1375 5655,1270 5720,1270 5810,1180 5810,1110 5795,1095 5550,1095
3V3_RP2CAN on Top Layer "NONET_L-01_P-001" (solid, remove dead copper, pour order 29): 3719,1080.5 3764,1080.5 3784,1060.5 3784,995.5 3799.5,980 4052.61,980 4052.61,747.54 3669.46,747.54 3634,783 3634,890.5 3699,955.5 3699,1060.5
12V on Top Layer "NONET_L-01_P-001" (solid, remove dead copper, pour order 27): 5605,1385 5585,1405 5550,1405 5550,1700 5590,1700 5796.96,1493.04 5796.96,1320 5670,1320
12V on Top Layer "NONET_L-01_P-001" (solid, remove dead copper, pour order 26): 432.5,1482.5 432.5,1447.5 450,1430 2080,1430 2205,1555 2205,1700 970,1700 960,1710 800,1710 800,1560 780,1540 490,1540
"12V Toggle" on Top Layer "NONET_L-01_P-001" (solid, remove dead copper, pour order 25): 465,1650 440,1675 440,1750 470,1780 780,1780 780,1557 585,1557 585,1615 550,1650
GND on Top Layer "NONET_L-01_P-001" (solid, remove dead copper, pour order 23): 1730,1020 1910,1020 1910,840 1730,840
GND on Top Layer "NONET_L-01_P-001" (solid, remove dead copper, pour order 20): 2720,1020 2900,1020 2900,840 2720,840
GND on Top Layer "NONET_L-01_P-001" (solid, remove dead copper, pour order 19): 1760,2690 1900,2690 1940,2650 1940,2490 1720,2490 1720,2650
Vreg on Top Layer "NONET_L-01_P-001" (solid, remove dead copper, pour order 6): 5540,1720 5540,1995 3858,1995 3383,2470 2810,2470 2810,2200 3290,1720
5V on Top Layer "NONET_L-01_P-001" (solid, remove dead copper, pour order 10): 5550,1375 2935,1375 2828.82,1268.82 2828.82,1141.18 2918.82,1051.18 2918.82,910 3150,910 3150,1095 5550,1095
12V on Top Layer "NONET_L-01_P-001" (solid, remove dead copper, pour order 9): 5550,1700 2120,1700 1880,1460 1880,1090 1970,1000 1970,930 2180,930 2180,1325 2260,1405 5550,1405
Vreg on Top Layer "NONET_L-01_P-001" (solid, remove dead copper, pour order 4): 2550,3900 2500,3850 2350,3850 2200,3700 2200,3025 1425,3025 1425,3750 2000,4325 2550,4325
V+ on Top Layer "NONET_L-01_P-001" (solid, remove dead copper, pour order 2): 2600,3100 2600,4325 2700,4425 3150,4425 3250,4325 3250,3775 3150,3775 3150,3680 3240,3680 3240,3550 3190,3550 3100,3460 2740,3100
MOTOR_PWR on Top Layer "NONET_L-01_P-001" (solid, remove dead copper, pour order 1): 3265,3500 3350,3415 3475,3415 3530,3360 3530,2825 3635,2720 4100,2720 4100,3905 4050,3955 3305,3955 3265,3915
3V3_RP2CAN on Top Layer "3V3_RP2040" (solid, remove dead copper, pour order 0): 3826.61,980.92 5483,980.92 5483,60.92 3826.61,60.92
GND on Bottom Layer "NONET_L-01_P-001" (solid, remove dead copper, pour order 17): 0,2600 7000,2600 7000,0 0,0
GND on Bottom Layer "NONET_L-01_P-001" (solid, remove dead copper, pour order 7): 3060,2580 3690,1950 5630,1950 5720,2040 5720,2600 4270,2600 4140,2730 3060,2730
GND on Bottom Layer "NONET_L-01_P-001" (solid, remove dead copper, pour order 3): 1300,4500 4150,4500 4150,2600 4125,2575 1300,2575

## Keep-outs
Bottom Layer:
  lines w10: 2425,3085 2485,3025 2625,3025 3670,1980 5940,1980 ; 3680,2040 5735,2040 5740,2600 ; 6470.66,703.44 6475.66,703.44
Keep-Out Layer:
  circle w10: c1600,4200 r200
  circle w10: c6200,2300 r200
  circle w10: c6200,300 r200
  circle w10: c300,300 r200
  circle w10: c750,4200 r200
  circle w10: c3850,4200 r200

## Other copper
Top Layer:
  pour cut-out: 4718.89,978.13 4508.89,978.13 4503.89,973.13 4503.89,723.13 4643.89,723.13 4733.89,783.13
  pour cut-out: 5089.47,600.98 5085.41,590.23 5085.41,557.34 5091.47,551.29 5121.47,551.29 5121.47,576.29 5111.47,586.29
  pour cut-out: 4586.7,342.44 4586.74,342.41 4586.74,322.01 4787.31,323.13 4798.83,334.65 4798.83,339.29 4763.26,339.29 4739.2,363.35 4717.04,363.35 4702.02,348.33 4692.02,348.33
  pour cut-out: 4288.67,355.26 4288.89,355.48 4288.89,572.23 4236.28,572.23 4208.96,544.91 4208.96,472.3 4193.89,457.23 4193.89,357.23
  pour cut-out: 4378.89,462.36 4428.89,412.36 4428.89,367.36 4338.89,367.36 4338.89,402.36

## Silkscreen, mask and mechanical layers (free items; w line width, h text height)
Top Overlay:
  drawing of 243 lines, arcs and shapes, not listed
  text "Motor" at 3560,4439.98 h30 r270
  text "V+" at 3435,4399.99 h30 r270
  text "Vreg" at 1890,4114.98 h30 r270
  text "V+" at 3625.08,2350.05 h300
  text "KILL" at 1000,2162.48 h30 r270
  text "GND" at 910,2149.99 h30 r270
  text "GND" at 910,2009.99 h30 r270
  text "AUX" at 1000,2009.99 h30 r270
  text "GND" at 6050,1880.01 h30 r90
  text "12V" at 6050,1742.51 h30 r90
  text "TOGGLE" at 1047.5,1612.49 h15 r270
  text "GND" at 950,1609.99 h30 r270
  text "GND" at 4630.13,1560.05 h300
  text "GND" at 950,1469.99 h30 r270
  text "12V" at 1040,1467.49 h30 r270
  text "V+" at 5559.99,1355.01 h30 r90
  text "12V" at 5470,1342.51 h30 r90
  text "GND" at 950,1329.99 h30 r270
  text "12V" at 1040,1327.49 h30 r270
  text "GND" at 570,1249.99 h30 r270
  text "12V" at 660,1247.49 h30 r270
  text "5V" at 5469.99,1215.01 h30 r90
  text "GND" at 5560,1200.01 h30 r90
  text "UART" at 660,1124.98 h30 r270
  text "GND" at 570,1109.99 h30 r270
  text "12V" at 1265.02,1050.01 h60
  text "CANH" at 5469.99,1045.02 h30 r90
  text "CANL" at 5559.99,1045.02 h30 r90
  text "5V" at 2295.02,1040.01 h60
  text "3V3" at 4280.03,990.01 h60
  text "ORIN" at 6040.72,800.46 h120
  text "TERM / ON" at 5299.69,792 h40
  text "The Underwater Robotics Team" at 1010,210 h60
  text "BOOT" at 4853.1,121.35 h40
  text "RESET" at 5069.33,121.35 h40
  text "Leak" at 5675.03,110.01 h60
  text ".ProjectTitle" at 1010,85 h60
Bottom Overlay:
  drawing of 95 lines, arcs and shapes, not listed
Top Solder:
  circle w88.5: c1600,4200 r44.25
  circle w88.5: c750,4200 r44.25
  circle w88.5: c6200,300 r44.25
  circle w88.5: c300,300 r44.25
  circle w88.5: c6200,2300 r44.25
  circle w88.5: c3850,4200 r44.25
Bottom Solder:
  circle w88.5: c1600,4200 r44.25
  circle w88.5: c750,4200 r44.25
  circle w88.5: c6200,300 r44.25
  circle w88.5: c300,300 r44.25
  circle w88.5: c6200,2300 r44.25
  circle w88.5: c3850,4200 r44.25

## Text inside footprints (layer, text, board x,y; h text height)
U1: Top Overlay "*" at 2690,3872.5 h50 r90; Mechanical 13 "*" at 2556,3997.5 h50 r90
U4: Top Overlay "*" at 3040,3045 h50 r90; Mechanical 13 "*" at 3086.5,3100.5 h50 r90
U5: Top Overlay "*" at 3329.5,2872.6 h50 r180; Mechanical 13 "*" at 3281,2917 h50 r180
U6: Top Overlay "*" at 3310,3060 h50 r90; Mechanical 13 "*" at 3361.5,3110.5 h50 r90